# EAGLE board mainboard_10_1_Feb_2022,_200341 (EAGLE 9.6.2), part 1 of 2
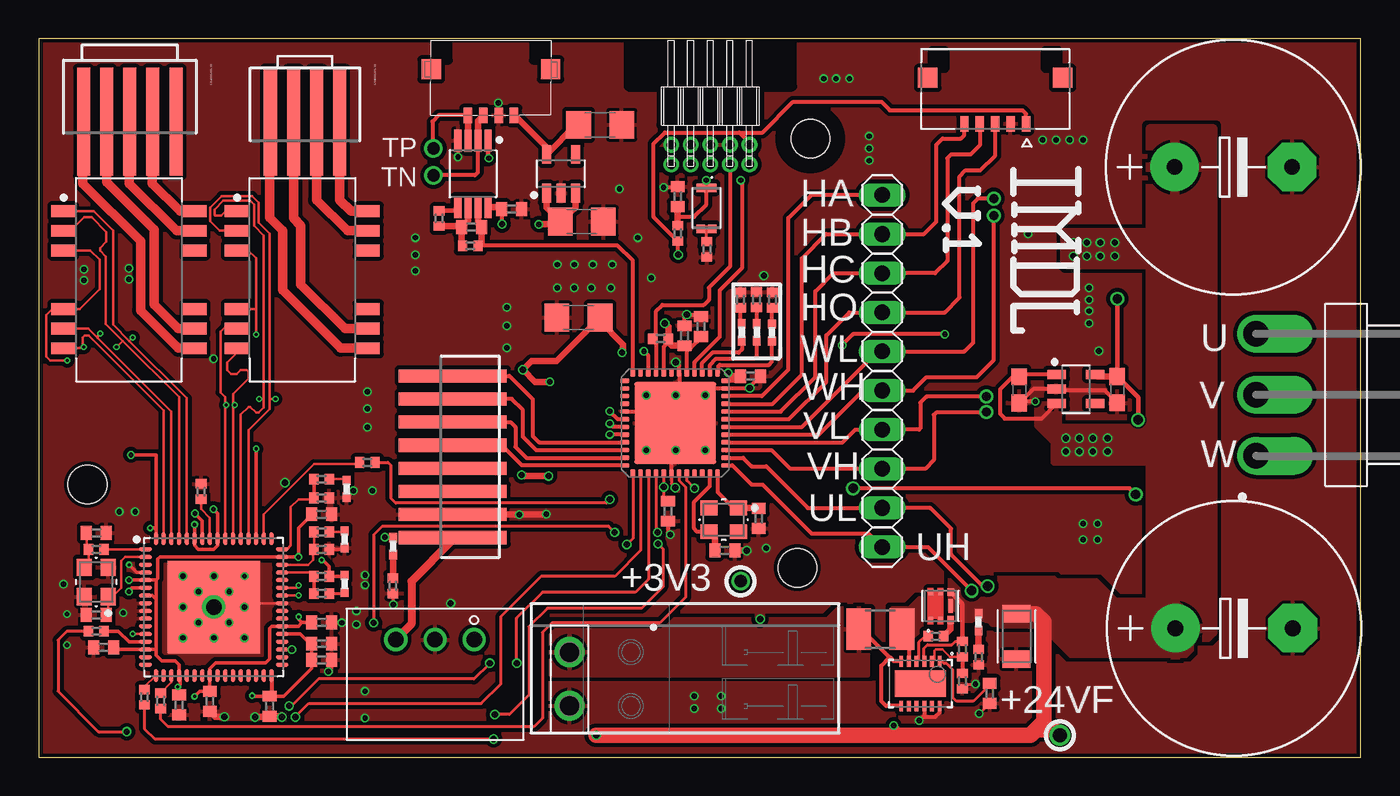
[diagram p0: board, top side]
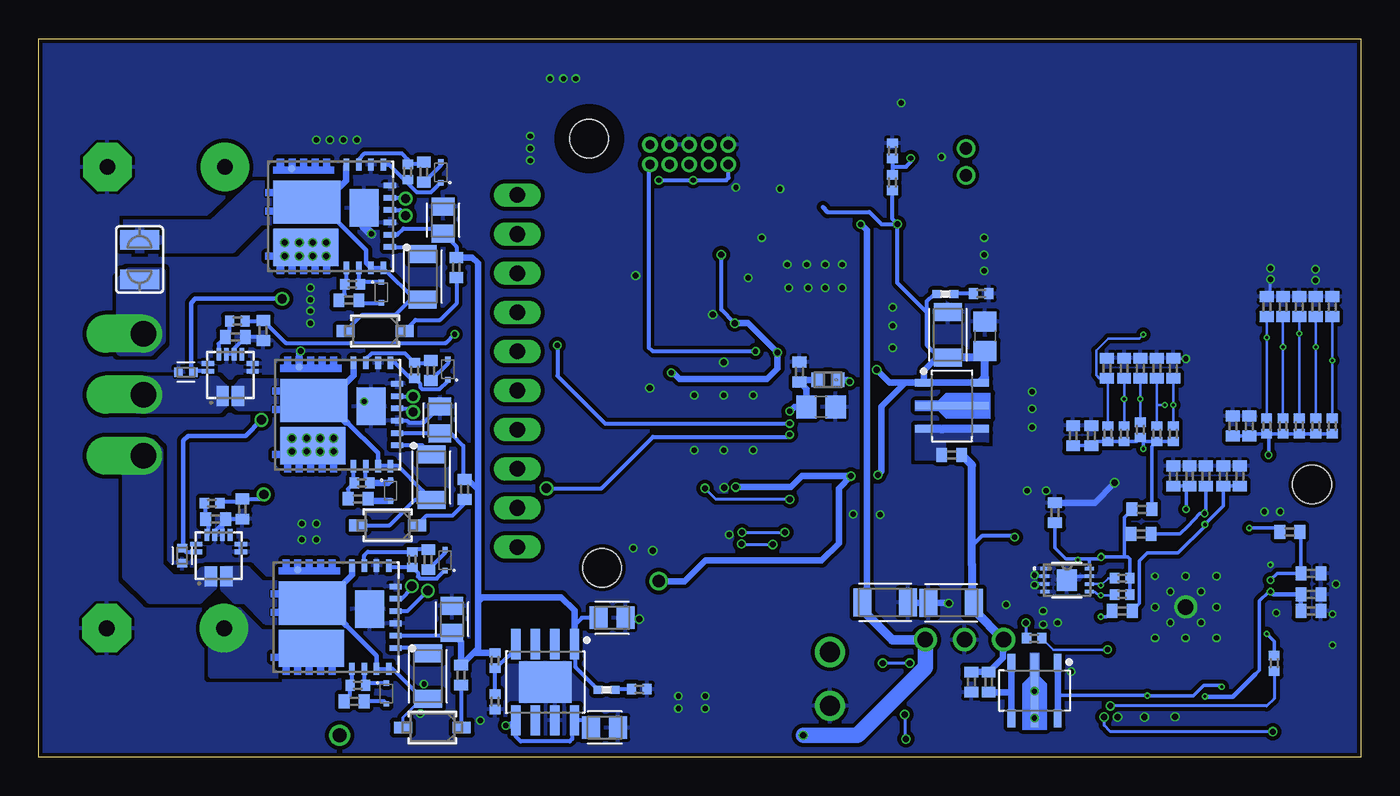
[diagram p1: board, bottom side, seen from below]

Size 85.82 x 46.66 mm. Coordinates in mm from the lower left corner, seen from the top.
Outline: 0,0 85.82,0 85.82,46.66 0,46.66 0,0
Copper layers (1*16): Top 0.018mm / dielectric 1.55mm / Bottom 0.018mm
Design rules "Multi-CB_2L_100µm-Tracks_OL35µm": minimum track width 0.1mm, minimum drill 0.2mm, track to track 0.1mm, track to pad 0.1mm, pad to pad 0.1mm, via to via 0.1mm, smd to smd 0mil, copper to edge 0.2mm, drill to drill 0.2mm, minimum pad ring 0.125mm, minimum via ring 0.1mm, stop-mask expansion 2mil, vias tented up to drill 0.45mm, thermal gap 0.2mm
Net classes: 0 default: width 0.152 mm, drill 0.2 mm, clearance 0.076 mm; 1 power: width 0.229 mm, drill 0.2 mm, clearance 0.152 mm
Holes 2.5 mm at 3.18,17.71 50.11,40.17 49.24,12.3
tKeepout: area 1.4,15.9 to 5,19.5; area 47.4,10.5 to 51,14.1
bKeepout: area 47.4,10.5 to 51,14.1; area 1.4,15.9 to 5,19.5
tRestrict: area 48.3,38.4 to 51.9,42
bRestrict: area 48.3,38.4 to 51.9,42

## Footprints (pad centres in the part's own frame; a part is rotated, then mirrored left to right if it is on the bottom)
C0402 = smd 0.7 x 0.9: 1 -0.65,0; 2 0.65,0
USOP8 = smd 1.425 x 0.467: 1 -2.164,0.975; 2 -2.164,0.325; 3 -2.164,-0.325; 4 -2.164,-0.975; 5 2.164,-0.975; 6 2.164,-0.325; 7 2.164,0.325; 8 2.164,0.975
R0402 = smd 0.6 x 0.7: 1 -0.5,0; 2 0.5,0
C1206 = smd 1.6 x 1.8: 1 -1.4,0; 2 1.4,0
C0805 = smd 1.3 x 1.5: 1 -0.95,0; 2 0.95,0
LED0402 = smd 0.6 x 0.5: 1 -0.55,0; 2 0.55,0
QFN48 = smd 0.55 x 0.3: 1 -3.275,2.75; 2 -3.275,2.25; 3 -3.275,1.75; 4 -3.275,1.25; 5 -3.275,0.75; 6 -3.275,0.25; 7 -3.275,-0.25; 8 -3.275,-0.75; 9 -3.275,-1.25; 10 -3.275,-1.75; 11 -3.275,-2.25; 12 -3.275,-2.75; 25 3.275,-2.75; 26 3.275,-2.25; 27 3.275,-1.75; 28 3.275,-1.25; 29 3.275,-0.75; 30 3.275,-0.25; 31 3.275,0.25; 32 3.275,0.75; 33 3.275,1.25; 34 3.275,1.75; 35 3.275,2.25; 36 3.275,2.75 | smd 0.3 x 0.55: 13 -2.75,-3.275; 14 -2.25,-3.275; 15 -1.75,-3.275; 16 -1.25,-3.275; 17 -0.75,-3.275; 18 -0.25,-3.275; 19 0.25,-3.275; 20 0.75,-3.275; 21 1.25,-3.275; 22 1.75,-3.275; 23 2.25,-3.275; 24 2.75,-3.275; 37 2.75,3.275; 38 2.25,3.275; 39 1.75,3.275; 40 1.25,3.275; 41 0.75,3.275; 42 0.25,3.275; 43 -0.25,3.275; 44 -0.75,3.275; 45 -1.25,3.275; 46 -1.75,3.275; 47 -2.25,3.275; 48 -2.75,3.275 | smd 5.309 x 5.309: EXP 0,0
BEADC1608X80 = smd 0.813 x 0.94: 1 -0.673,0; 2 0.673,0
USLPT2616CT = smd 0.55 x 0.55: 1 -1.325,0.375; 2 1.325,0.375; 3 -1.325,-0.375; 4 1.325,-0.375
ECX-2236 = smd 1.112 x 0.962: 1 -0.95,-0.775; 2 0.95,-0.775; 3 0.95,0.775; 4 -0.95,0.775
CAPC1005X60 = smd 0.56 x 0.629: 1 -0.485,0; 2 0.485,0
C0603 = smd 1.1 x 1: 1 -0.85,0; 2 0.85,0
QFN12-ES = smd 1.3 x 0.8: 1,2 -1.35,0.5; 3,4 -1.35,-0.5 | smd 0.3 x 0.8: 5 0.25,-1.45; 6 0.75,-1.45; 11 0.75,1.45; 12 0.25,1.45 | smd 0.8 x 0.3: 7 1.35,-0.75; 8 1.35,-0.25; 9 1.35,0.25; 10 1.35,0.75
SOT-23-5 = smd 1.209 x 0.589: 1 -1.253,0.95; 2 -1.253,0; 3 -1.253,-0.95; 4 1.253,-0.95; 5 1.253,0.95
SJW = smd 1.27 x 2.54: 1 -1.27,0; 2 1.27,0
UDFN8 = smd 0.606 x 0.225: 1 -1.446,0.75; 2 -1.446,0.25; 3 -1.446,-0.25; 4 -1.446,-0.75; 5 1.446,-0.75; 6 1.446,-0.25; 7 1.446,0.25; 8 1.446,0.75 | smd 1.295 x 1.397: 9 0,0
SOT-89-5 = smd 1.17 x 0.491: 1 -1.814,1.5; 3 -1.814,-1.5; 4 1.814,-1.5; 5 1.814,1.5 | smd 4.75 x 0.491: 2 0,0
BEAD0402 = smd 0.7 x 0.9: 1 -0.65,0; 2 0.65,0
SOIC127P965X533-16-TRAFO = smd 1.512 x 0.772: 1 -4.275,4.445; 2 -4.275,3.175; 3 -4.275,1.905; 6 -4.275,-1.905; 7 -4.275,-3.175; 8 -4.275,-4.445; 9 4.275,-4.445; 10 4.275,-3.175; 11 4.275,-1.905; 14 4.275,1.905; 15 4.275,3.175; 16 4.275,4.445
QFN64-T600 = smd 0.837 x 0.264: 1 -4.437,3.75; 2 -4.437,3.25; 3 -4.437,2.75; 4 -4.437,2.25; 5 -4.437,1.75; 6 -4.437,1.25; 7 -4.437,0.75; 8 -4.437,0.25; 9 -4.437,-0.25; 10 -4.437,-0.75; 11 -4.437,-1.25; 12 -4.437,-1.75; 13 -4.437,-2.25; 14 -4.437,-2.75; 15 -4.437,-3.25; 16 -4.437,-3.75; 33 4.437,-3.75; 34 4.437,-3.25; 35 4.437,-2.75; 36 4.437,-2.25; 37 4.437,-1.75; 38 4.437,-1.25; 39 4.437,-0.75; 40 4.437,-0.25; 41 4.437,0.25; 42 4.437,0.75; 43 4.437,1.25; 44 4.437,1.75; 45 4.437,2.25; 46 4.437,2.75; 47 4.437,3.25; 48 4.437,3.75 | smd 0.264 x 0.837: 17 -3.75,-4.437; 18 -3.25,-4.437; 19 -2.75,-4.437; 20 -2.25,-4.437; 21 -1.75,-4.437; 22 -1.25,-4.437; 23 -0.75,-4.437; 24 -0.25,-4.437; 25 0.25,-4.437; 26 0.75,-4.437; 27 1.25,-4.437; 28 1.75,-4.437; 29 2.25,-4.437; 30 2.75,-4.437; 31 3.25,-4.437; 32 3.75,-4.437; 49 3.75,4.437; 50 3.25,4.437; 51 2.75,4.437; 52 2.25,4.437; 53 1.75,4.437; 54 1.25,4.437; 55 0.75,4.437; 56 0.25,4.437; 57 -0.25,4.437; 58 -0.75,4.437; 59 -1.25,4.437; 60 -1.75,4.437; 61 -2.25,4.437; 62 -2.75,4.437; 63 -3.25,4.437; 64 -3.75,4.437 | smd 6 x 6: 65 0,0
87438-04 = smd 7 x 0.85: 1 0,2.25; 2 0,0.75; 3 0,-0.75; 4 0,-2.25
87438-05 = smd 7 x 0.85: 1 0,3; 2 0,1.5; 3 0,0; 4 0,-1.5; 5 0,-3
20021112-00010 = drill 0.6 pad 1.016: 1 -2.54,-0.635; 2 -2.54,0.635; 3 -1.27,-0.635; 4 -1.27,0.635; 5 0,-0.635; 6 0,0.635; 7 1.27,-0.635; 8 1.27,0.635; 9 2.54,-0.635; 10 2.54,0.635
CAPC2012X110 = smd 1.165 x 1.465: 1 -0.875,0; 2 0.875,0
CAPC3216X135 = smd 1.165 x 1.815: 1 -1.475,0; 2 1.475,0
E7,5-16 = drill 1.016 pad 3.15: + -3.81,0 | drill 1.016 pad 3.15 octagon: - 3.81,0
SOD123_MCC-M = smd 1.168 x 0.762: 1 -1.905,0; 2 1.905,0
INFINEON_BAS3005A-02V_0 = smd 0.35 x 0.35: 1 -0.672,0; 2 0.678,0
R0402' = smd 0.7 x 0.9: 1 -0.65,0; 2 0.65,0
INFINEON_IRSM005-800MH_0 = smd 0.36 x 0.8: 1 -2,-3.85; 2 -1.2,-3.85; 3 -0.4,-3.85; 4 0.4,-3.85; 5 1.2,-3.85; 6 2,-3.85 | smd 0.8 x 0.36: 7 3.35,-3.42; 8 3.35,-2.62; 9 3.35,-1.82; 10 3.35,-1.02; 24 -3.35,-1.02; 25 -3.35,-1.82; 26 -3.35,-2.62; 27 -3.35,-3.42 | smd 0.489 x 0.489: 11-12-13-14-15 3.076,2.516 | smd 2.794 x 4.318: 16-17 0.915,1.546 | smd 2.413 x 4.191: 18-19-20-21-22-23 -2.016,1.602 | smd 2.43 x 1.86: 28 0.53,-2.17
MOLEX_5037630591 = smd 0.55 x 1: 1 2,-2.265; 2 1,-2.265; 3 0,-2.265; 4 -1,-2.265; 5 -2,-2.265 | smd 1.26 x 1.3: S1 4.375,0.725; S2 -4.375,0.725
1X10 = drill 1.016 long: 1 -11.43,0; 2 -8.89,0; 3 -6.35,0; 4 -3.81,0; 5 -1.27,0; 6 1.27,0; 7 3.81,0; 8 6.35,0; 9 8.89,0; 10 11.43,0
1945096 = drill 1.3: 1 -1.75,0; 2 1.75,0
SOIC127P600X170-9T271X340N = smd 1.968 x 0.598: 1 -2.473,1.905; 2 -2.473,0.635; 3 -2.473,-0.635; 4 -2.473,-1.905; 5 2.473,-1.905; 6 2.473,-0.635; 7 2.473,0.635; 8 2.473,1.905 | smd 2.71 x 3.402: 9 0,0
R78E-1.0 = drill 1 pad 1.422: 1 -2.54,-2.54; 2 0,-2.54; 3 2.54,-2.54
TRANS_DMN4020LFDE-7 = smd 0.4 x 0.3: 1 -0.9,0.65; 2 -0.9,0; 5 0.9,0; 6 0.9,0.65 | smd 0.5 x 0.4: 3 -0.9,-0.65; 4_1 0.9,-0.65 | smd 0.92 x 0.285: 4_2 0,-0.65
R1210 = smd 1.6 x 2.7: 1 -1.4,0; 2 1.4,0
LINEAR_TECHNOLOGY_LT4356IDE-1#PBF_0 = smd 0.7 x 0.25: 1 -1.45,1.25; 2 -1.45,0.75; 3 -1.45,0.25; 4 -1.45,-0.25; 5 -1.45,-0.75; 6 -1.45,-1.25; 7 1.45,-1.25; 8 1.45,-0.75; 9 1.45,-0.25; 10 1.45,0.25; 11 1.45,0.75; 12 1.45,1.25 | smd 1.7 x 3.3: 13 0,0
B3PS-VH(LF)(SN) = drill 1.65 offset: 1 -3.96,0; 2 0,0; 3 3.96,0
87438-08 = smd 7 x 0.85: 1 0,5.25; 2 0,3.75; 3 0,2.25; 4 0,0.75; 5 0,-0.75; 6 0,-2.25; 7 0,-3.75; 8 0,-5.25
5037630491 = smd 0.55 x 1: 1 1.5,0; 2 0.5,0; 3 -0.5,0; 4 -1.5,0 | smd 1.26 x 1.3: P$1 3.875,2.99; P$2 -3.875,2.99

## Placement (x,y rotation side)
AFE_TRQ1:C1  GCM155R71C683KA55  [C0402]  28.1,34.43 180 top
AFE_TRQ1:C2  GCM155R71C104JA55  [C0402]  30.7,35.57 0 top
AFE_TRQ1:IC1  MAX4208AUA+T  [USOP8]  28.19,37.88 270 top
AFE_TRQ1:R1  RT0402FRE07100RL  [R0402]  25.99,34.98 270 top
AFE_TRQ1:R2  RT0402BRD0712KL  [R0402]  30.4,37.31 270 bottom
AFE_TRQ1:R3  RT0402FRE0756KL  [R0402]  28.02,33.2 0 top
AFE_TRQ1:R4  RT0402BRD0710KL  [R0402]  30.4,39.37 270 bottom
ATSAMD:C4  GCM31CR71C106KA64  [C1206]  35.04,28.55 180 top
ATSAMD:C5  GCM21BR70J106KE22K  [C0805]  35.04,22.75 0 bottom
ATSAMD:C6  GCM21BR70J106KE22K  [C0805]  24.4,27.33 90 bottom
ATSAMD:C7  GCM155R71C104JA55  [C0402]  41.92,27.37 90 top
ATSAMD:C8  GCM155R71C104JA55  [C0402]  36.44,25.02 90 bottom
ATSAMD:C9  GCM155R71C104JA55  [C0402]  40.84,15.98 270 top
ATSAMD:C10  GCM155R71C104JA55  [C0402]  46.2,24.74 0 top
ATSAMD:C11  GCM155R71C104JA55  [C0402]  42.99,27.97 90 top
ATSAMD:C12  GCM155R71C104JA55  [C0402]  41.48,36.4 90 top
ATSAMD:C22  GCM1555C1H150FA16  [C0402]  44.54,13.44 180 top
ATSAMD:C23  GCM1555C1H150FA16  [C0402]  46.74,15.5 90 top
ATSAMD:D1  QBLP595-IB  [LED0402]  45.64,27.59 270 top
ATSAMD:D2  QBLP595-O  [LED0402]  47.6,27.58 270 top
ATSAMD:D3  QBLP595-Y  [LED0402]  46.61,27.59 270 top
ATSAMD:IC2  ATSAMD51G18A-MUT  [QFN48]  41.32,21.7 0 top
ATSAMD:L1  BLM18EG221SN1D  [BEADC1608X80]  34.59,24.51 180 bottom
ATSAMD:R1  RT0402BRD0710KL  [R0402]  47.62,29.69 90 top
ATSAMD:R2  RT0402BRD0710KL  [R0402]  45.56,29.69 90 top
ATSAMD:R4  RT0402BRD0710KL  [R0402]  46.59,29.71 90 top
ATSAMD:R5  RT0402FRE07300RL  [R0402]  43.37,32.98 90 top
ATSAMD:R6  RT0402FRE0710KL  [R0402]  41.48,34.02 270 top
ATSAMD:R7  RT0402FRE071KL  [R0402]  40.37,27.17 0 top
ATSAMD:S2  USLPT2616CT2TR  [USLPT2616CT]  43.35,35.64 270 top
ATSAMD:Y2  [ECX-2236]  44.46,15.42 180 top
CURRENT_SENS:C1  0.1u  [CAPC1005X60]  76.5,13.09 90 bottom
CURRENT_SENS:C2  0.1u  [CAPC1005X60]  76.25,25 0 bottom
CURRENT_SENS:C3  GCM1555C1H510JA01  [C0402]  73.04,27.28 0 bottom
CURRENT_SENS:C4  GCM1555C1H510JA01  [C0402]  74.33,15.46 0 bottom
CURRENT_SENS:C5  GCM155R71E223KA55  [C0402]  72.59,16.12 270 bottom
CURRENT_SENS:C6  GCM155R71E223KA55  [C0402]  71.23,27.71 270 bottom
CURRENT_SENS:C7  GCM188R71C105KA64  [C0603]  70,23.87 270 top
CURRENT_SENS:C8  GCM188R71C105KA64  [C0603]  63.65,23.85 270 top
CURRENT_SENS:IC1  ACS70331EESATR-005B3  [QFN12-ES]  74.14,13.08 90 bottom
CURRENT_SENS:IC2  ACS70331EESATR-005B3  [QFN12-ES]  73.37,24.82 90 bottom
CURRENT_SENS:IC4  AP2204K-3.3TRG1  [SOT-23-5]  67.32,23.91 0 top
CURRENT_SENS:R3  RT0402BRD071KL  [R0402]  74.56,16.5 180 bottom
CURRENT_SENS:R4  RT0402BRD071KL  [R0402]  72.92,28.32 180 bottom
CURRENT_SENS:SJ1  [SJW]  79.26,32.31 270 bottom
ETHERCAT1:C1  1u  [C0402]  18.68,20.88 90 bottom
ETHERCAT1:C2  100n  [C0402]  17.5,20.88 90 bottom
ETHERCAT1:C3  1u  [C0402]  8.31,21.5 90 bottom
ETHERCAT1:C4  100n  [C0402]  7.25,21.5 90 bottom
ETHERCAT1:C5  100n  [C0402]  10.06,18.25 90 bottom
ETHERCAT1:C6  1u  [C0402]  12.18,18.25 90 bottom
ETHERCAT1:C7  100n  [C0402]  11.12,18.25 90 bottom
ETHERCAT1:C8  1u  [C0402]  8.93,18.25 90 bottom
ETHERCAT1:C9  100n  [C0402]  7.87,18.25 90 bottom
ETHERCAT1:C10  100n  [C0402]  3.25,11.94 0 bottom
ETHERCAT1:C11  100n  [C0402]  4.22,7.13 180 top
ETHERCAT1:C12  100n  [C0402]  9.12,3.4 270 top
ETHERCAT1:C13  100n  [C0402]  15,3.32 270 top
ETHERCAT1:C14  100n  [C0402]  18.37,7.38 0 top
ETHERCAT1:C15  100n  [C0402]  18.37,15.78 0 top
ETHERCAT1:C16  1u  [C0402]  3.25,10.57 0 bottom
ETHERCAT1:C17  470p  [C0402]  3.25,9.5 0 bottom
ETHERCAT1:C18  100n  [C0402]  11.12,3.64 270 top
ETHERCAT1:C19  100n  [C0402]  18.37,8.75 0 top
ETHERCAT1:C20  18p  [C0402]  3.75,14.57 180 top
ETHERCAT1:C21  18p  [C0402]  3.75,9.25 0 top
ETHERCAT1:C22  100n  [C0402]  19.86,15.88 90 bottom
ETHERCAT1:C23  GCM1555C1H100JA16  [C0402]  12.18,25.25 90 bottom
ETHERCAT1:C24  GCM1555C1H100JA16  [C0402]  13.25,25.25 90 bottom
ETHERCAT1:C25  GCM1555C1H100JA16  [C0402]  14.31,25.25 90 bottom
ETHERCAT1:C26  GCM1555C1H100JA16  [C0402]  15.37,25.25 90 bottom
ETHERCAT1:C27  GCM1555C1H100JA16  [C0402]  6.12,29.25 90 bottom
ETHERCAT1:C28  GCM1555C1H100JA16  [C0402]  5.06,29.25 90 bottom
ETHERCAT1:C29  GCM1555C1H100JA16  [C0402]  4,29.25 90 bottom
ETHERCAT1:C30  GCM1555C1H100JA16  [C0402]  2.93,29.25 90 bottom
ETHERCAT1:C31  22n  [C0402]  16.5,25.25 90 bottom
ETHERCAT1:C32  22n  [C0402]  1.87,29.25 90 bottom
ETHERCAT1:C33  GRM155C80J106ME11D  [C0402]  18.37,6.32 0 top
ETHERCAT1:C66  1uF  [C0402]  25.29,4.89 270 bottom
ETHERCAT1:D1  QBLP595-IG  [LED0402]  19.87,11.25 90 top
ETHERCAT1:D2  QBLP595-IG  [LED0402]  20,17.43 90 top
ETHERCAT1:D3  QBLP595-IG  [LED0402]  19.87,14.15 90 top
ETHERCAT1:IC1  CAT24C512HU5IGT3  [UDFN8]  19.07,11.5 0 bottom
ETHERCAT1:IC2  RP115H331B-T1-FE  [SOT-89-5]  21.19,4.33 270 bottom
ETHERCAT1:L1  BLM15EG221SH1D  [BEAD0402]  14.22,16.1 0 bottom
ETHERCAT1:L2  BLM15EG221SH1D  [BEAD0402]  4.62,14.63 180 bottom
ETHERCAT1:L3  BLM15EG221SH1D  [BEAD0402]  14.27,14.49 0 bottom
ETHERCAT1:L4  BLM15EG221SH1D  [BEAD0402]  15.5,9.5 0 bottom
ETHERCAT1:L5  BLM15EG221SH1D  [BEAD0402]  24.16,4.89 270 bottom
ETHERCAT1:R1  0R  [R0402]  3.75,13.5 0 top
ETHERCAT1:R2  12k1  [R0402]  10.55,17.25 270 top
ETHERCAT1:R4  4k7  [R0402]  15.5,11.63 0 bottom
ETHERCAT1:R5  4k7  [R0402]  15.5,10.57 0 bottom
ETHERCAT1:R6  10k  [R0402]  18.37,11.75 0 top
ETHERCAT1:R7  RL1206FR-7WL  [R0402]  18.37,10.63 180 top
ETHERCAT1:R8  49R9  [R0402]  15.37,21 270 bottom
ETHERCAT1:R9  49R9  [R0402]  14.31,21.25 270 bottom
ETHERCAT1:R10  49R9  [R0402]  13.25,21 270 bottom
ETHERCAT1:R11  49R9  [R0402]  12.18,21 270 bottom
ETHERCAT1:R12  49R9  [R0402]  2.93,21.5 270 bottom
ETHERCAT1:R13  49R9  [R0402]  4,21.5 270 bottom
ETHERCAT1:R14  49R9  [R0402]  5.06,21.5 270 bottom
ETHERCAT1:R15  49R9  [R0402]  6.12,21.5 270 bottom
ETHERCAT1:R16  0R  [R0402]  16.43,21 270 bottom
ETHERCAT1:R17  0R  [R0402]  1.87,21.5 270 bottom
ETHERCAT1:R18  100  [R0402]  7.93,3.67 270 top
ETHERCAT1:R19  100  [R0402]  21.34,19.14 0 top
ETHERCAT1:R20  100  [R0402]  21.2,7.73 180 bottom
ETHERCAT1:R21  100  [R0402]  5.64,6.1 270 bottom
ETHERCAT1:R22  100  [R0402]  3.75,8.19 180 top
ETHERCAT1:R23  100  [R0402]  6.87,3.9 270 top
ETHERCAT1:R24  10k  [R0402]  18.37,16.84 180 top
ETHERCAT1:R25  10k  [R0402]  18.37,13.5 180 top
ETHERCAT1:R26  RL1206FR-7WL  [R0402]  18.37,18.05 0 top
ETHERCAT1:R27  RL1206FR-7WL  [R0402]  18.37,14.63 0 top
ETHERCAT1:T1  749020100  [SOIC127P965X533-16-TRAFO]  17.12,31 0 top
ETHERCAT1:T2  749020100  [SOIC127P965X533-16-TRAFO]  5.87,31 0 top
ETHERCAT1:U1  LAN9252/ML  [QFN64-T600]  11.37,9.75 0 top
ETHERCAT1:X1  87438-0443  [87438-04]  17.3,41.25 270 top
ETHERCAT1:X3  87438-0543  [87438-05]  5.92,41.25 270 top
ETHERCAT1:Y1  [ECX-2236]  3.75,11.38 90 top
H1  20021112-00010T4LF  [20021112-00010]  43.6,39.13 180 top
INVERTER:C1  10u 25V  [CAPC2012X110]  58.99,8.96 270 bottom
INVERTER:C2  10u 50V  [CAPC3216X135]  60.55,5.27 270 bottom
INVERTER:C3  10u 25V  [CAPC2012X110]  59.77,21.89 270 bottom
INVERTER:C4  10u 50V  [CAPC3216X135]  60.33,18.18 270 bottom
INVERTER:C5  10u 25V  [CAPC2012X110]  59.57,34.87 270 bottom
INVERTER:C6  10u 50V  [CAPC3216X135]  60.88,31.19 270 bottom
INVERTER:C7  1mF  [E7,5-16]  77.54,38.32 0 top
INVERTER:C8  1mF  [E7,5-16]  77.59,8.38 0 top
INVERTER:CR1  1N4148W-TPSOD123_MCC-M  [SOD123_MCC-M]  63.17,15.06 180 bottom
INVERTER:CR2  1N4148W-TPSOD123_MCC-M  [SOD123_MCC-M]  63.98,27.67 180 bottom
INVERTER:CR3  1N4148W-TPSOD123_MCC-M  [SOD123_MCC-M]  60.26,1.94 180 bottom
INVERTER:D2  BAS3005A-02V_0  [INFINEON_BAS3005A-02V_0]  63.24,4.15 270 bottom
INVERTER:D3  BAS3005A-02V_0  [INFINEON_BAS3005A-02V_0]  59.44,12.8 90 bottom
INVERTER:D4  BAS3005A-02V_0  [INFINEON_BAS3005A-02V_0]  59.26,25.17 90 bottom
INVERTER:D5  BAS3005A-02V_0  [INFINEON_BAS3005A-02V_0]  62.98,17.31 270 bottom
INVERTER:D7  BAS3005A-02V_0  [INFINEON_BAS3005A-02V_0]  59.7,37.97 90 bottom
INVERTER:D8  BAS3005A-02V_0  [INFINEON_BAS3005A-02V_0]  63.57,30.18 270 bottom
INVERTER:R1  100  [R0402]  61.56,12.83 90 bottom
INVERTER:R2  27  [R0402']  60.53,12.83 90 bottom
INVERTER:R3  100  [R0402]  65.1,4.67 180 bottom
INVERTER:R4  27  [R0402']  60.36,25.11 90 bottom
INVERTER:R5  5.1  [R0402']  58.71,31.8 90 bottom
INVERTER:R6  27  [R0402']  65.08,16.79 180 bottom
INVERTER:R7  100  [R0402]  61.42,25.1 90 bottom
INVERTER:R8  100  [R0402]  64.82,17.82 180 bottom
INVERTER:R9  27  [R0402']  60.81,37.99 90 bottom
INVERTER:R10  5.1  [R0402']  58.17,17.39 90 bottom
INVERTER:R11  100  [R0402]  61.86,37.99 90 bottom
INVERTER:R12  100  [R0402]  65.44,30.7 180 bottom
INVERTER:R13  27  [R0402']  65.69,29.67 180 bottom
INVERTER:R14  5.1  [R0402']  58.4,5.34 90 bottom
INVERTER:R15  27  [R0402']  65.34,3.64 180 bottom
INVERTER:U$1  IRMS005-800MHTR  [INFINEON_IRSM005-800MH_0]  66.5,9.09 90 bottom
INVERTER:U$2  IRMS005-800MHTR  [INFINEON_IRSM005-800MH_0]  66.4,22.25 90 bottom
INVERTER:U$3  IRMS005-800MHTR  [INFINEON_IRSM005-800MH_0]  66.86,35.12 90 bottom
J1  5037630591  [MOLEX_5037630591]  62.09,43.38 0 top
JP1  [1X10]  54.75,25.08 90 top
M1  PST1,3/2-3,5  [1945096]  34.45,5.08 270 top
POWER_UNIT:C1  GCM155R71E223KA55  [C0402]  61.72,4.15 270 top
POWER_UNIT:C2  10u 50V  [CAPC3216X135]  26.81,27.43 90 bottom
POWER_UNIT:C3  10u 50V  [CAPC3216X135]  30.88,10.05 0 bottom
POWER_UNIT:C4  10u 50V  [CAPC3216X135]  26.6,10.03 180 bottom
POWER_UNIT:C5  GCM31CR71H225KA55  [C1206]  35.26,34.78 0 top
POWER_UNIT:C6  10u 50V  [CAPC3216X135]  63.47,7.85 270 top
POWER_UNIT:C7  2.2u  [CAPC2012X110]  49.08,1.93 0 bottom
POWER_UNIT:C8  2.2u  [CAPC2012X110]  48.6,9.06 0 bottom
POWER_UNIT:C9  GCM31CR71H225KA55  [C1206]  36.45,41.05 0 top
POWER_UNIT:D1  QBLP595-IG  [LED0402]  61,8.78 90 top
POWER_UNIT:D2  QBLP595-IG  [LED0402]  23.01,13.7 90 top
POWER_UNIT:D3  QBLP595-IG  [LED0402]  26.97,30.08 180 bottom
POWER_UNIT:D4  QBLP595-IG  [LED0402]  48.96,4.39 180 bottom
POWER_UNIT:IC1  RP115H331B-T1-FE  [SOT-89-5]  26.54,22.82 0 bottom
POWER_UNIT:IC2  AP2204MP-ADJTRG1  [SOIC127P600X170-9T271X340N]  52.95,4.88 270 bottom
POWER_UNIT:IC3  AP2204K-3.3TRG1  [SOT-23-5]  33.91,37.88 90 top
POWER_UNIT:L5  BLM15EG221SH1D  [BEAD0402]  26.56,19.63 180 bottom
POWER_UNIT:PS2  R78E-1.0-5V  [R78E-1.0]  25.73,5.1 180 top
POWER_UNIT:Q1  DMN4020LFDE-7  [TRANS_DMN4020LFDE-7]  58.54,9.83 90 top
POWER_UNIT:R1  RT0402FRE07100RL  [R0402]  58.23,7.87 0 top
POWER_UNIT:R2  RT0402FRE07100KL  [R0402]  59.96,7.02 90 top
POWER_UNIT:R4  10m  [R1210]  54.63,8.32 180 top
POWER_UNIT:R5  11k  [R0402]  56.19,6.29 90 bottom
POWER_UNIT:R6  1k  [R0402]  56.19,3.61 90 bottom
POWER_UNIT:R7  1k  [R0402]  61.01,6.51 90 top
POWER_UNIT:R8  1k  [R0402]  22.99,11.13 90 top
POWER_UNIT:R9  1k  [R0402]  24.64,30.1 180 bottom
POWER_UNIT:R10  1k  [R0402]  46.84,4.43 180 bottom
POWER_UNIT:R11  RT0402BRD074K99L  [R0402]  59.95,4.95 90 top
POWER_UNIT:U1  LT4356-1LINEAR_TECHNOLOGY_LT4356IDE-1#PBF_0_0  [LINEAR_TECHNOLOGY_LT4356IDE-1#PBF_0]  57.23,4.78 270 top
U$1  PTDA1,5/2-PH-3,5  [1725107]  34.45,5.08 90 top
X2  B3PS-VH(LF)(SN)  [B3PS-VH(LF)(SN)]  79.01,23.54 90 top
X4  87438-0843  [87438-08]  26.88,19.51 180 top
X5  5037630491  [5037630491]  29.36,41.67 0 top

## Library data of the parts
AFE_TRQ1:C1 = msrm; CAPACITANCE: 6n8F; DIGIKEY: 490-12655-1-ND; TOLERANCE: ±10%; VOLTAGE: 16V
AFE_TRQ1:C2 ATSAMD:C7-ATSAMD:C12 ETHERCAT1:C2 ETHERCAT1:C4 ETHERCAT1:C5 ETHERCAT1:C7 ETHERCAT1:C9-ETHERCAT1:C15 ETHERCAT1:C18 ETHERCAT1:C19 ETHERCAT1:C22 = msrm; CAPACITANCE: 100nF; DIGIKEY: 490-16433-1-ND; TOLERANCE: ±5%; VOLTAGE: 16V
AFE_TRQ1:IC1 = msrm; DESCRIPTION: Instrument Amp Single R-R O/P 2.75/5.5V; DIGIKEY: MAX4208AUA+-ND; HEIGHT: 1.1mm; INPUT_RESISTANCE: 2G; MANUFACTURER_NAME: Maxim Integrated; MANUFACTURER_PART_NUMBER: MAX4208AUA+; MOUSER_PART_NUMBER: 700-MAX4208AUA; MOUSER_PRICE-STOCK: https://www.mouser.com/Search/Refine.aspx?Keyword=700-MAX4208AUA; RS_PART_NUMBER: 7328406P; RS_PRICE-STOCK: http://uk.rs-online.com/web/p/products/7328406P; SUPPLY_CURRENT: Buffer OFF: 0.75 - 1.3 mA Buffer ON: 1.4 - 2.3 mA; SUPPLY_VOLTAGE: Single: 2.85 - 5.5 Dual: ±1.425 - ±2.75; VOLTAGE_GAIN: 1 - (1 + R2/R1)
AFE_TRQ1:R1 ETHERCAT1:R18-ETHERCAT1:R23 INVERTER:R1 INVERTER:R3 INVERTER:R7 INVERTER:R8 INVERTER:R11 INVERTER:R12 POWER_UNIT:R1 = msrm; DIGIKEY: YAG3342CT-ND; RVALUE: 100; SPICEPREFIX: R
AFE_TRQ1:R2 POWER_UNIT:R5 = msrm; DIGIKEY: YAG1354CT-ND; RVALUE: 12k; SPICEPREFIX: R
AFE_TRQ1:R3 = msrm; DIGIKEY: RT0402FRE0756K2L-ND; RVALUE: 56k; SPICEPREFIX: R
AFE_TRQ1:R4 ATSAMD:R1 ATSAMD:R2 ATSAMD:R4 = msrm; DIGIKEY: ‎A119918CT-ND‎; RVALUE: 10k; SPICEPREFIX: R
ATSAMD:C4 = msrm; CAPACITANCE: 10uF; DIGIKEY: 490-14746-1-ND; TOLERANCE: ±10%; VOLTAGE: 16V
ATSAMD:C5 ATSAMD:C6 = msrm; CAPACITANCE: 10uF; DIGIKEY: 490-14361-1-ND; TOLERANCE: ±10%; VOLTAGE: 6.3V
ATSAMD:C22 ATSAMD:C23 = msrm; CAPACITANCE: 15pF; DIGIKEY: 490-14350-1-ND; TOLERANCE: ±1%; VOLTAGE: 50V
ATSAMD:D1 = msrm; COLOR: Blue; DIGIKEY: 1516-1215-1-ND
ATSAMD:D2 = msrm; COLOR: Orange; DIGIKEY: 1516-1220-1-ND
ATSAMD:D3 = msrm; COLOR: Yellow; DIGIKEY: 1516-1219-1-ND
ATSAMD:IC2 = msrm; DIGIKEY: ATSAMD51G18A-MUTCT-ND; FLASH: 256KB; SRAM: 128KB
ATSAMD:L1 = msrm; DC_RES: 50mOhm; DIGIKEY: 490-3992-6-ND; IMPEDANCE-FREQUENCY: 220 Ohms @ 100MHz
ATSAMD:R5 = msrm; DIGIKEY: RT0402FRE07300RL-ND; RVALUE: 300; SPICEPREFIX: R
ATSAMD:R6 ETHERCAT1:R6 ETHERCAT1:R7 ETHERCAT1:R24-ETHERCAT1:R27 = msrm; DIGIKEY: YAG1233CT-ND; RVALUE: 10k; SPICEPREFIX: R
ATSAMD:R7 = msrm; DIGIKEY: YAG1234CT-ND; RVALUE: 1k; SPICEPREFIX: R
ATSAMD:S2 = msrm; DIGIKEY: 450-3357-1-ND; FORCE: 160gf; HEIGHT: 0.55mm; MANUFACTURER_NAME: TE Connectivity; MANUFACTURER_PART_NUMBER: USLPT2616CT2TR; MOUSER_PART_NUMBER: 506-USLPT2616CT2TR
ATSAMD:Y2 = msrm; DIGIKEY: XC3057CT-ND; ESR: 40 Ohm; F: 32MHz; F_TOLERANCE: ±10ppm; L_CAPACITANCE: 12pF
CURRENT_SENS:C1 CURRENT_SENS:C2 INVERTER:C1-INVERTER:C6 POWER_UNIT:C6-POWER_UNIT:C8 = Capacitor; CATEGORY: Capacitor
CURRENT_SENS:C3 CURRENT_SENS:C4 = msrm; CAPACITANCE: 51pF; DIGIKEY: 490-5944-1-ND; TOLERANCE: ±5%; VOLTAGE: 50V
CURRENT_SENS:C5 CURRENT_SENS:C6 ETHERCAT1:C31 ETHERCAT1:C32 POWER_UNIT:C1 = msrm; CAPACITANCE: 22nF; DIGIKEY: 490-6044-1-ND; TOLERANCE: ±10%; VOLTAGE: 25V
CURRENT_SENS:C7 CURRENT_SENS:C8 = msrm; CAPACITANCE: 1uF; DIGIKEY: 490-5241-1-ND; TOLERANCE: ±10%; VOLTAGE: 16V
CURRENT_SENS:IC1 CURRENT_SENS:IC2 = msrm; CURRENT_RANGE: -5~5A; DIGIKEY: 620-1887-1-ND; DISPLAY: ACS70331; SENSITIVITY: 200mV/A
CURRENT_SENS:IC4 POWER_UNIT:IC3 = msrm; DIGIKEY: AP2204K-3.3TRG1DICT-ND
CURRENT_SENS:R3 CURRENT_SENS:R4 POWER_UNIT:R6-POWER_UNIT:R10 = msrm; DIGIKEY: YAG1386CT-ND; RVALUE: 1k; SPICEPREFIX: R
CURRENT_SENS:SJ1 = jumper
ETHERCAT1:C1 ETHERCAT1:C3 ETHERCAT1:C6 ETHERCAT1:C8 ETHERCAT1:C16 ETHERCAT1:C66 = msrm; CAPACITANCE: 1uF; DIGIKEY: 490-13409-1-ND; TOLERANCE: ±10%; VOLTAGE: 10V
ETHERCAT1:C17 = msrm; CAPACITANCE: 470pF; DIGIKEY: 490-4913-1-ND; TOLERANCE: ±10%; VOLTAGE: 50V
ETHERCAT1:C20 ETHERCAT1:C21 = msrm; CAPACITANCE: 18pF; DIGIKEY: 490-12650-1-ND; TOLERANCE: ±5%; VOLTAGE: 50V
ETHERCAT1:C23-ETHERCAT1:C30 = msrm; CAPACITANCE: 10pF; DIGIKEY: 490-10668-1-ND; TOLERANCE: ±5%; VOLTAGE: 50V
ETHERCAT1:C33 = msrm; CAPACITANCE: 10uF; DIGIKEY: 490-13233-1-ND; TOLERANCE: ±20%; VOLTAGE: 6.3V
ETHERCAT1:D1-ETHERCAT1:D3 POWER_UNIT:D1-POWER_UNIT:D4 = msrm; COLOR: Green; DIGIKEY: 1516-1216-1-ND
ETHERCAT1:IC1 = msrm; DIGIKEY: CAT24C512HU5IGT3OSCT-ND; LEAD_FINISH: NiPdAu; TEMPERATURE: -40°C ~ 85°C
ETHERCAT1:IC2 POWER_UNIT:IC1 = msrm; DIGIKEY: RP115H331B-T1-FE-ND; VOLTAGE: 3.3V
ETHERCAT1:L1-ETHERCAT1:L5 POWER_UNIT:L5 = msrm; DC_RES: 280mOhm; DIGIKEY: 490-17345-1-ND; IMPEDANCE-FREQUENCY: 220 Ohms @ 100MHz
ETHERCAT1:R1 ETHERCAT1:R16 ETHERCAT1:R17 = msrm; DIGIKEY: 311-0.0LRCT-ND; NOTES: Actual Part Number: RC0402FR-070RL; RVALUE: 0R; SPICEPREFIX: R
ETHERCAT1:R2 = msrm; DIGIKEY: RT0402FRE0712K1L-ND; RVALUE: 12k1; SPICEPREFIX: R
ETHERCAT1:R4 ETHERCAT1:R5 = msrm; DIGIKEY: YAG3347CT-ND; RVALUE: 4k7; SPICEPREFIX: R
ETHERCAT1:R8-ETHERCAT1:R15 = msrm; DIGIKEY: YAG3346CT-ND; RVALUE: 49R9; SPICEPREFIX: R
ETHERCAT1:T1 ETHERCAT1:T2 = msrm; DIGIKEY: 732-3268-1-ND
ETHERCAT1:U1 = msrm; DIGIKEY: LAN9252/ML-ND; TAPE_AND_REEL: Tray; TEMP: 0°C to 70°C
ETHERCAT1:X1 = msrm; DIGIKEY: WM7648CT-ND; MF: MOLEX
ETHERCAT1:X3 = msrm; COLOR: beige; DIGIKEY: WM7649CT-ND
ETHERCAT1:Y1 = msrm; DIGIKEY: XC3051CT-ND; F: 25MHz; F_TOLERANCE: ±10ppm; L_CAPACITANCE: 18pF
H1 = msrm; DIGIKEY: 609-5926-ND; PINS: 10
INVERTER:C7 INVERTER:C8 = rcl; SPICEPREFIX: C
INVERTER:CR1-INVERTER:CR3 = msrm; CURRENT: 150mA; DIGIKEY: 1N4148WTPMSCT-ND; VOLTAGE: 100V
INVERTER:D2-INVERTER:D5 INVERTER:D7 INVERTER:D8 = IMDL_lib; CIIVA_IDS: 21182063; COMPONENT_LINK_1_DESCRIPTION: Manufacturer URL; COMPONENT_LINK_1_URL: http://www.infineon.com/; COMPONENT_LINK_3_DESCRIPTION: Package Specification; COMPONENT_LINK_3_URL: http://www.infineon.com/dgdl/SC79-Package_Overview.pdf?folderId=db3a30431936bc4b011951fbddb03b15&fileId=db3a30431936bc4b01195226fe583b41; CONFIGURATION: single; CT_MAX: 15Â pF; DATASHEET: http://www.infineon.com/dgdl/bas3005aseries.pdf?folderId=db3a30431f848401011fcbf2ab4c04c4&fileId=db3a30432d9b3066012db872f12d0bb7; FOOTPRINT_VARIANT_NAME_0: Manufacturer Recommended; GREEN: true; HALOGEN_FREE: true; IF_MAX: 500Â mA; IMPORTED: yes; IMPORTED_FROM: vault; IMPORT_TS: 1521842213; MF: Infineon; MOUNTING_TECHNOLOGY: Surface Mount; MPN: BAS3005A-02V; PACKAGE: SC79; PACKAGE_DESCRIPTION: 2-Pin Semiconductor Package, 0.8 x 1.2 mm Body; PACKING: Reel; PREFIX: D; RELEASE_DATE: 1409237543; VAULT_GUID: EDAD54E0-67A3-4491-B804-28965AC47742; VAULT_REVISION: E1FDBEC9-D20E-4450-8851-E2B6A9887AF8; VF_MAX: 500Â V; VR_MAX: 30Â V
INVERTER:R2 INVERTER:R4-INVERTER:R6 INVERTER:R9 INVERTER:R10 INVERTER:R13-INVERTER:R15 POWER_UNIT:R4 = resistor
INVERTER:U$1-INVERTER:U$3 POWER_UNIT:PS2 = IMDL_lib
J1 = IMDL_lib; AVAILABILITY: In Stock; DESCRIPTION: Connector Header Surface Mount, Right Angle 5 position 0.039 (1.00mm); MF: Molex; MP: 5037630591; PACKAGE: None; PRICE: None; PURCHASE-URL: https://pricing.snapeda.com/search/part/5037630591/?ref=eda
JP1 = pinhead
M1 = msrm; DIGIKEY: 277-1749-ND; PITCH: 3,5
POWER_UNIT:C2-POWER_UNIT:C4 = IMDL_lib; CATEGORY: Capacitor
POWER_UNIT:C5 POWER_UNIT:C9 = msrm; CAPACITANCE: 2.2uF; DIGIKEY: 490-11169-1-ND; TOLERANCE: ±10%; VOLTAGE: 50V
POWER_UNIT:IC2 = msrm; DIGIKEY: AP2204MP-ADJTRG1DICT-ND
POWER_UNIT:Q1 = TRANS_DMN4020LFDE
POWER_UNIT:R2 = msrm; DIGIKEY: YAG2307CT-ND; RVALUE: 100k; SPICEPREFIX: R
POWER_UNIT:R11 = msrm; DIGIKEY: YAG1447CT-ND; RVALUE: 4k99; SPICEPREFIX: R
POWER_UNIT:U1 = IMDL_lib; ACTIVE_LIMITING: yes; CIIVA_IDS: 280364; CIRCUIT_BREAKERS: 1; CIRCUIT_BREAKER_ACCURACY: 10; CIRCUIT_BREAKER_THRESHOLD: 50 mV; CODE__JEDEC: MO-229; COMPONENT_LINK_1_DESCRIPTION: Manufacturer URL; COMPONENT_LINK_1_URL: http://www.linear.com/; COMPONENT_LINK_3_DESCRIPTION: Package Specification; COMPONENT_LINK_3_URL: http://cds.linear.com/docs/en/packaging/DFN_12_05-08-1695.pdf; DATASHEET: http://cds.linear.com/docs/en/datasheet/4356fa.pdf; DATASHEET_VERSION: Rev. A; EXTENDED_TEMP: C, I, H; FAST_COMPARATOR: no; FAULT: no; FOLDBACK: yes; FOOTPRINT_VARIANT_NAME_0: Manufacturer Recommended; IMPORTED: yes; IMPORTED_FROM: vault; IMPORT_TS: 1521855815; IN_RUSH_CURRENT: Ramp; MF: Linear Technology; MOUNTING_TECHNOLOGY: Surface Mount; MPN: LT4356IDE-1#PBF; PACKAGE: DE-UE-12; PACKAGE_DESCRIPTION: 12-Pin Plastic DFN, Body 4 x 3 mm, Pitch 0.5 mm; PACKAGE_VERSION: Rev. D, 06/2010; POWER_GOOD: no; PREFIX: U; RELEASE_DATE: 1377783053; RESET: no; ROHS: Yes; VAULT_GUID: 8B93637D-5FE0-477F-B341-97109F4E71FC; VAULT_REVISION: E0CC90F7-5B63-48A8-B828-07365940982B; VIN_RANGE: 4 to 80 V
U$1 = msrm; DIGIKEY: 277-17182-ND
X2 = msrm; DIGIKEY: 455-1649-ND
X4 = msrm; DIGIKEY: WM7652CT-ND
X5 = msrm; DIGIKEY: WM10655CT-ND

## Nets
!FLT!: POWER_UNIT:U1.8
+3V3: AFE_TRQ1:C2.1 AFE_TRQ1:IC1.8 AFE_TRQ1:R2.2 ATSAMD:C4.1 ATSAMD:C6.1 ATSAMD:C7.1 ATSAMD:C9.1 ATSAMD:C10.1 ATSAMD:C11.1 ATSAMD:IC2.17 ATSAMD:IC2.36 ATSAMD:IC2.41 ATSAMD:IC2.44 ATSAMD:L1.1 ATSAMD:R6.2 ATSAMD:R7.2 H1.1 J1.1 POWER_UNIT:C2.1 POWER_UNIT:D3.2 POWER_UNIT:IC1.1 POWER_UNIT:IC1.5
+5V: ETHERCAT1:C66.1 ETHERCAT1:L5.1 POWER_UNIT:C4.1 POWER_UNIT:D2.2 POWER_UNIT:L5.1 POWER_UNIT:PS2.3 X4.1
+5V_TRQ: POWER_UNIT:C9.1 POWER_UNIT:IC3.5 X5.1
+15V: INVERTER:C1.2 INVERTER:C3.2 INVERTER:C5.2 INVERTER:R5.2 INVERTER:R10.2 INVERTER:R14.2 INVERTER:U$1.2 INVERTER:U$2.2 INVERTER:U$3.2 POWER_UNIT:C8.1 POWER_UNIT:D4.2 POWER_UNIT:IC2.1 POWER_UNIT:R5.2
+24V: M1.1 POWER_UNIT:R4.2 POWER_UNIT:U1.6 POWER_UNIT:U1.7
+24V_F: CURRENT_SENS:C8.1 CURRENT_SENS:IC4.1 CURRENT_SENS:IC4.3 INVERTER:C7.+ INVERTER:C8.+ INVERTER:U$1.18-19-20-21-22-23 INVERTER:U$2.18-19-20-21-22-23 INVERTER:U$3.18-19-20-21-22-23 POWER_UNIT:C3.1 POWER_UNIT:C5.1 POWER_UNIT:C6.1 POWER_UNIT:C7.1 POWER_UNIT:D1.2 POWER_UNIT:IC2.5 POWER_UNIT:IC2.8 POWER_UNIT:IC3.1 POWER_UNIT:IC3.3 POWER_UNIT:PS2.1 POWER_UNIT:Q1.4_1 POWER_UNIT:Q1.4_2 POWER_UNIT:R2.2 POWER_UNIT:U1.3
AFE_TRQ1:ANAREF: AFE_TRQ1:IC1.1 AFE_TRQ1:R2.1 AFE_TRQ1:R4.2
AFE_TRQ1:N$1: AFE_TRQ1:IC1.5 AFE_TRQ1:R1.1
AFE_TRQ1:N$4: AFE_TRQ1:C1.2 AFE_TRQ1:IC1.6 AFE_TRQ1:R1.2 AFE_TRQ1:R3.1
ATSAMD:ANAREF: ATSAMD:IC2.4
ATSAMD:D1: ATSAMD:D1.2 ATSAMD:IC2.39
ATSAMD:D2: ATSAMD:D2.2 ATSAMD:IC2.37
ATSAMD:D3: ATSAMD:D3.2 ATSAMD:IC2.38
ATSAMD:N$1: ATSAMD:D3.1 ATSAMD:R4.1
ATSAMD:N$2: ATSAMD:D2.1 ATSAMD:R1.1
ATSAMD:N$12: ATSAMD:C5.1 ATSAMD:C8.1 ATSAMD:IC2.6 ATSAMD:L1.2
ATSAMD:N$13: ATSAMD:R5.2 ATSAMD:S2.2 ATSAMD:S2.4
ATSAMD:N$16: ATSAMD:D1.1 ATSAMD:R2.1
ATSAMD:XIN: ATSAMD:C22.2 ATSAMD:IC2.23 ATSAMD:Y2.3
ATSAMD:XOUT: ATSAMD:C23.2 ATSAMD:IC2.24 ATSAMD:Y2.1
CURRENT_SENS:+3V3_CURR: CURRENT_SENS:C1.2 CURRENT_SENS:C2.2 CURRENT_SENS:C7.1 CURRENT_SENS:IC1.12 CURRENT_SENS:IC2.12 CURRENT_SENS:IC4.5
CURRENT_SENS:U_OUT: CURRENT_SENS:C4.1 CURRENT_SENS:IC1.10 CURRENT_SENS:R3.2
CURRENT_SENS:V_OUT: CURRENT_SENS:C3.1 CURRENT_SENS:IC2.10 CURRENT_SENS:R4.2
ECAT_CS: ATSAMD:IC2.20 ETHERCAT1:R19.2
ECAT_MISO: ATSAMD:IC2.14 ETHERCAT1:R22.2
ECAT_MOSI: ATSAMD:IC2.13 ETHERCAT1:R23.2
ECAT_SCK: ATSAMD:IC2.19 ETHERCAT1:R18.2
ECAT_SQI2: ATSAMD:IC2.15 ETHERCAT1:R21.2
ECAT_SQI3: ATSAMD:IC2.16 ETHERCAT1:R20.2
EN: POWER_UNIT:U1.9
ENC_MISO: ATSAMD:IC2.10 X4.7
ENC_MOSI: ATSAMD:IC2.9 X4.8
ENC_NCS: ATSAMD:IC2.11 X4.6
ENC_SCK: ATSAMD:IC2.12 X4.5
ETHERCAT1:#MISO: ETHERCAT1:R22.1 ETHERCAT1:U1.13
ETHERCAT1:#MOSI: ETHERCAT1:R23.1 ETHERCAT1:U1.17
ETHERCAT1:#SCK: ETHERCAT1:R18.1 ETHERCAT1:U1.19
ETHERCAT1:#SCS#: ETHERCAT1:R19.1 ETHERCAT1:U1.50
ETHERCAT1:#SQI2: ETHERCAT1:R21.1 ETHERCAT1:U1.12
ETHERCAT1:#SQI3: ETHERCAT1:R20.1 ETHERCAT1:U1.35
ETHERCAT1:+3V3 [power]: ETHERCAT1:C10.1 ETHERCAT1:C11.1 ETHERCAT1:C12.1 ETHERCAT1:C13.1 ETHERCAT1:C14.1 ETHERCAT1:C15.1 ETHERCAT1:C22.1 ETHERCAT1:C33.1 ETHERCAT1:D1.2 ETHERCAT1:IC1.8 ETHERCAT1:IC2.1 ETHERCAT1:IC2.5 ETHERCAT1:L1.1 ETHERCAT1:L2.1 ETHERCAT1:L3.1 ETHERCAT1:R4.2 ETHERCAT1:R5.2 ETHERCAT1:R6.2 ETHERCAT1:U1.5 ETHERCAT1:U1.7 ETHERCAT1:U1.14 ETHERCAT1:U1.20 ETHERCAT1:U1.32 ETHERCAT1:U1.37 ETHERCAT1:U1.47
ETHERCAT1:CT1: ETHERCAT1:C31.1 ETHERCAT1:R16.1 ETHERCAT1:T1.3 ETHERCAT1:T1.6
ETHERCAT1:CT2: ETHERCAT1:C32.1 ETHERCAT1:R17.1 ETHERCAT1:T2.3 ETHERCAT1:T2.6
ETHERCAT1:GPIO0: ETHERCAT1:R24.2 ETHERCAT1:R26.1 ETHERCAT1:U1.48
ETHERCAT1:GPIO1: ETHERCAT1:R25.2 ETHERCAT1:R27.1 ETHERCAT1:U1.46
ETHERCAT1:GPIO2: ETHERCAT1:R6.1 ETHERCAT1:R7.2 ETHERCAT1:U1.45
ETHERCAT1:I2C_SCL: ETHERCAT1:IC1.6 ETHERCAT1:R4.1 ETHERCAT1:U1.43
ETHERCAT1:I2C_SDA: ETHERCAT1:IC1.5 ETHERCAT1:R5.1 ETHERCAT1:U1.42
ETHERCAT1:IN_RX_N: ETHERCAT1:T1.9 ETHERCAT1:X1.4
ETHERCAT1:IN_RX_P: ETHERCAT1:T1.10 ETHERCAT1:X1.3
ETHERCAT1:IN_TX_N: ETHERCAT1:T1.15 ETHERCAT1:X1.2
ETHERCAT1:IN_TX_P: ETHERCAT1:T1.16 ETHERCAT1:X1.1
ETHERCAT1:IRQ: ETHERCAT1:U1.44
ETHERCAT1:N$1: ETHERCAT1:D2.2 ETHERCAT1:R26.2
ETHERCAT1:N$2: ETHERCAT1:D3.2 ETHERCAT1:R27.2
ETHERCAT1:N$3: ETHERCAT1:IC2.3 ETHERCAT1:IC2.4 ETHERCAT1:L5.2
ETHERCAT1:N$15: ETHERCAT1:D1.1 ETHERCAT1:R7.1
ETHERCAT1:OSCI: ETHERCAT1:R1.2 ETHERCAT1:U1.1
ETHERCAT1:OSCI1: ETHERCAT1:C20.2 ETHERCAT1:R1.1 ETHERCAT1:Y1.3
ETHERCAT1:OSCO: ETHERCAT1:C21.2 ETHERCAT1:U1.2 ETHERCAT1:Y1.1
ETHERCAT1:OSCVDD12: ETHERCAT1:U1.3
ETHERCAT1:OUT_RX_N: ETHERCAT1:T2.9 ETHERCAT1:X3.5
ETHERCAT1:OUT_RX_P: ETHERCAT1:T2.10 ETHERCAT1:X3.4
ETHERCAT1:OUT_TX_N: ETHERCAT1:T2.15 ETHERCAT1:X3.3
ETHERCAT1:OUT_TX_P: ETHERCAT1:T2.16 ETHERCAT1:X3.2
ETHERCAT1:RBIAS: ETHERCAT1:R2.2 ETHERCAT1:U1.57
ETHERCAT1:RST#: ETHERCAT1:U1.11
ETHERCAT1:RXA_N: ETHERCAT1:C24.1 ETHERCAT1:R10.1 ETHERCAT1:T1.8 ETHERCAT1:U1.54
ETHERCAT1:RXA_P: ETHERCAT1:C23.1 ETHERCAT1:R11.1 ETHERCAT1:T1.7 ETHERCAT1:U1.55
ETHERCAT1:RXB_N: ETHERCAT1:C28.1 ETHERCAT1:R14.1 ETHERCAT1:T2.2 ETHERCAT1:U1.61
ETHERCAT1:RXB_P: ETHERCAT1:C27.1 ETHERCAT1:R15.1 ETHERCAT1:T2.1 ETHERCAT1:U1.60
ETHERCAT1:TXA_N: ETHERCAT1:C26.1 ETHERCAT1:R8.1 ETHERCAT1:T1.2 ETHERCAT1:U1.52
ETHERCAT1:TXA_P: ETHERCAT1:C25.1 ETHERCAT1:R9.1 ETHERCAT1:T1.1 ETHERCAT1:U1.53
ETHERCAT1:TXB_N: ETHERCAT1:C30.1 ETHERCAT1:R12.1 ETHERCAT1:T2.8 ETHERCAT1:U1.63
ETHERCAT1:TXB_P: ETHERCAT1:C29.1 ETHERCAT1:R13.1 ETHERCAT1:T2.7 ETHERCAT1:U1.62
ETHERCAT1:VDD [power]: ETHERCAT1:C16.1 ETHERCAT1:C17.1 ETHERCAT1:C18.1 ETHERCAT1:C19.1 ETHERCAT1:L4.1 ETHERCAT1:U1.6 ETHERCAT1:U1.24 ETHERCAT1:U1.38
ETHERCAT1:VDD12TX [power]: ETHERCAT1:C6.1 ETHERCAT1:C7.1 ETHERCAT1:C8.1 ETHERCAT1:C9.1 ETHERCAT1:L4.2 ETHERCAT1:U1.56 ETHERCAT1:U1.59
ETHERCAT1:VDD33BIAS [power]: ETHERCAT1:C5.1 ETHERCAT1:L3.2 ETHERCAT1:U1.58
ETHERCAT1:VDD33TXRX1 [power]: ETHERCAT1:C1.1 ETHERCAT1:C2.1 ETHERCAT1:L1.2 ETHERCAT1:R8.2 ETHERCAT1:R9.2 ETHERCAT1:R10.2 ETHERCAT1:R11.2 ETHERCAT1:R16.2 ETHERCAT1:U1.51
ETHERCAT1:VDD33TXRX2 [power]: ETHERCAT1:C3.1 ETHERCAT1:C4.1 ETHERCAT1:L2.2 ETHERCAT1:R12.2 ETHERCAT1:R13.2 ETHERCAT1:R14.2 ETHERCAT1:R15.2 ETHERCAT1:R17.2 ETHERCAT1:U1.64
GND: AFE_TRQ1:C2.2 AFE_TRQ1:IC1.4 AFE_TRQ1:R4.1 ATSAMD:C4.2 ATSAMD:C5.2 ATSAMD:C6.2 ATSAMD:C7.2 ATSAMD:C8.2 ATSAMD:C9.2 ATSAMD:C10.2 ATSAMD:C11.2 ATSAMD:C12.2 ATSAMD:C22.1 ATSAMD:C23.1 ATSAMD:IC2.5 ATSAMD:IC2.18 ATSAMD:IC2.35 ATSAMD:IC2.42 ATSAMD:IC2.EXP ATSAMD:R1.2 ATSAMD:R2.2 ATSAMD:R4.2 ATSAMD:R5.1 CURRENT_SENS:C1.1 CURRENT_SENS:C2.1 CURRENT_SENS:C3.2 CURRENT_SENS:C4.2 CURRENT_SENS:C5.2 CURRENT_SENS:C6.2 CURRENT_SENS:C7.2 CURRENT_SENS:C8.2 CURRENT_SENS:IC1.5 CURRENT_SENS:IC1.6 CURRENT_SENS:IC1.8 CURRENT_SENS:IC1.9 CURRENT_SENS:IC1.11 CURRENT_SENS:IC2.5 CURRENT_SENS:IC2.6 CURRENT_SENS:IC2.8 CURRENT_SENS:IC2.9 CURRENT_SENS:IC2.11 CURRENT_SENS:IC4.2 ETHERCAT1:C1.2 ETHERCAT1:C2.2 ETHERCAT1:C3.2 ETHERCAT1:C4.2 ETHERCAT1:C5.2 ETHERCAT1:C6.2 ETHERCAT1:C7.2 ETHERCAT1:C8.2 ETHERCAT1:C9.2 ETHERCAT1:C10.2 ETHERCAT1:C11.2 ETHERCAT1:C12.2 ETHERCAT1:C13.2 ETHERCAT1:C14.2 ETHERCAT1:C15.2 ETHERCAT1:C16.2 ETHERCAT1:C17.2 ETHERCAT1:C18.2 ETHERCAT1:C19.2 ETHERCAT1:C20.1 ETHERCAT1:C21.1 ETHERCAT1:C22.2 ETHERCAT1:C23.2 ETHERCAT1:C24.2 ETHERCAT1:C25.2 ETHERCAT1:C26.2 ETHERCAT1:C27.2 ETHERCAT1:C28.2 ETHERCAT1:C29.2 ETHERCAT1:C30.2 ETHERCAT1:C31.2 ETHERCAT1:C32.2 ETHERCAT1:C33.2 ETHERCAT1:C66.2 ETHERCAT1:D2.1 ETHERCAT1:D3.1 ETHERCAT1:IC1.1 ETHERCAT1:IC1.2 ETHERCAT1:IC1.3 ETHERCAT1:IC1.4 ETHERCAT1:IC1.7 ETHERCAT1:IC1.9 ETHERCAT1:IC2.2 ETHERCAT1:R2.1 ETHERCAT1:R24.1 ETHERCAT1:R25.1 ETHERCAT1:U1.4 ETHERCAT1:U1.8 ETHERCAT1:U1.9 ETHERCAT1:U1.10 ETHERCAT1:U1.41 ETHERCAT1:U1.65 ETHERCAT1:Y1.2 ETHERCAT1:Y1.4 H1.3 H1.5 H1.9 INVERTER:C1.1 INVERTER:C3.1 INVERTER:C5.1 INVERTER:C7.- INVERTER:C8.- INVERTER:U$1.3 INVERTER:U$1.6 INVERTER:U$1.8 INVERTER:U$1.11-12-13-14-15 INVERTER:U$1.28 INVERTER:U$2.3 INVERTER:U$2.6 INVERTER:U$2.8 INVERTER:U$2.11-12-13-14-15 INVERTER:U$2.28 INVERTER:U$3.3 INVERTER:U$3.6 INVERTER:U$3.8 INVERTER:U$3.11-12-13-14-15 INVERTER:U$3.28 J1.2 M1.2 POWER_UNIT:C1.2 POWER_UNIT:C2.2 POWER_UNIT:C3.2 POWER_UNIT:C4.2 POWER_UNIT:C5.2 POWER_UNIT:C6.2 POWER_UNIT:C7.2 POWER_UNIT:C8.2 POWER_UNIT:C9.2 POWER_UNIT:IC1.2 POWER_UNIT:IC2.7 POWER_UNIT:IC2.9 POWER_UNIT:IC3.2 POWER_UNIT:PS2.2 POWER_UNIT:R6.1 POWER_UNIT:R7.1 POWER_UNIT:R8.1 POWER_UNIT:R9.1 POWER_UNIT:R10.1 POWER_UNIT:R11.1 POWER_UNIT:U1.10 POWER_UNIT:U1.12 X4.2 X5.2
HALL_A: ATSAMD:IC2.33 J1.5 JP1.9
HALL_B: ATSAMD:IC2.32 J1.4 JP1.8
HALL_C: ATSAMD:IC2.31 J1.3 JP1.7
HALL_O: ATSAMD:IC2.34 JP1.10
INVERTER:N$1: INVERTER:R3.2 INVERTER:R15.2 INVERTER:U$1.24
INVERTER:N$2: INVERTER:CR2.1 INVERTER:R5.1
INVERTER:N$3: INVERTER:D2.2 INVERTER:R15.1
INVERTER:N$4: INVERTER:C2.1 INVERTER:U$1.1
INVERTER:N$5: INVERTER:D3.1 INVERTER:R1.1 INVERTER:U$1.7
INVERTER:N$6: INVERTER:R1.2 INVERTER:R2.2 INVERTER:U$1.9
INVERTER:N$7: INVERTER:CR1.1 INVERTER:R10.1
INVERTER:N$8: INVERTER:D3.2 INVERTER:R2.1
INVERTER:N$9: INVERTER:CR3.1 INVERTER:R14.1
INVERTER:N$11: INVERTER:R6.2 INVERTER:R8.2 INVERTER:U$2.24
INVERTER:N$13: INVERTER:D2.1 INVERTER:R3.1 INVERTER:U$1.25
INVERTER:N$14: INVERTER:D4.1 INVERTER:R7.1 INVERTER:U$2.7
INVERTER:N$15: INVERTER:R4.2 INVERTER:R7.2 INVERTER:U$2.9
INVERTER:N$16: INVERTER:D4.2 INVERTER:R4.1
INVERTER:N$18: INVERTER:D5.1 INVERTER:R8.1 INVERTER:U$2.25
INVERTER:N$19: INVERTER:C4.1 INVERTER:U$2.1
INVERTER:N$21: INVERTER:D5.2 INVERTER:R6.1
INVERTER:N$25: INVERTER:R12.2 INVERTER:R13.2 INVERTER:U$3.24
INVERTER:N$26: INVERTER:D7.1 INVERTER:R11.1 INVERTER:U$3.7
INVERTER:N$27: INVERTER:R9.2 INVERTER:R11.2 INVERTER:U$3.9
INVERTER:N$28: INVERTER:D7.2 INVERTER:R9.1
INVERTER:N$30: INVERTER:D8.1 INVERTER:R12.1 INVERTER:U$3.25
INVERTER:N$31: INVERTER:C6.1 INVERTER:U$3.1
INVERTER:N$33: INVERTER:D8.2 INVERTER:R13.1
N$1: CURRENT_SENS:IC1.3,4 INVERTER:C2.2 INVERTER:CR3.2 INVERTER:U$1.10 INVERTER:U$1.16-17 INVERTER:U$1.26 INVERTER:U$1.27
N$2: CURRENT_SENS:IC2.3,4 INVERTER:C4.2 INVERTER:CR1.2 INVERTER:U$2.10 INVERTER:U$2.16-17 INVERTER:U$2.26 INVERTER:U$2.27
N$3: CURRENT_SENS:SJ1.1 INVERTER:C6.2 INVERTER:CR2.2 INVERTER:U$3.10 INVERTER:U$3.16-17 INVERTER:U$3.26 INVERTER:U$3.27
NRESET: ATSAMD:C12.1 ATSAMD:IC2.40 ATSAMD:R6.1 ATSAMD:S2.1 ATSAMD:S2.3 H1.10
POWER_UNIT:N$1: POWER_UNIT:Q1.3 POWER_UNIT:R1.2
POWER_UNIT:N$2: POWER_UNIT:R1.1 POWER_UNIT:U1.4
POWER_UNIT:N$3: POWER_UNIT:Q1.1 POWER_UNIT:Q1.2 POWER_UNIT:Q1.5 POWER_UNIT:Q1.6 POWER_UNIT:R4.1 POWER_UNIT:U1.5
POWER_UNIT:N$4: POWER_UNIT:R2.1 POWER_UNIT:R11.2 POWER_UNIT:U1.2
POWER_UNIT:N$6: POWER_UNIT:D1.1 POWER_UNIT:R7.2
POWER_UNIT:N$7: POWER_UNIT:IC2.4 POWER_UNIT:R5.1 POWER_UNIT:R6.2
POWER_UNIT:N$8: POWER_UNIT:C1.1 POWER_UNIT:U1.1
POWER_UNIT:N$9: POWER_UNIT:D2.1 POWER_UNIT:R8.2
POWER_UNIT:N$10: POWER_UNIT:D3.1 POWER_UNIT:R9.2
POWER_UNIT:N$11: POWER_UNIT:D4.1 POWER_UNIT:R10.2
POWER_UNIT:N$12 [power]: POWER_UNIT:IC1.3 POWER_UNIT:IC1.4 POWER_UNIT:L5.2
SWCLK: ATSAMD:IC2.45 ATSAMD:R7.1 H1.4
SWDIO: ATSAMD:IC2.46 H1.2
SWO: H1.6
TRQ_ADC: AFE_TRQ1:C1.1 AFE_TRQ1:IC1.7 AFE_TRQ1:R3.2 ATSAMD:IC2.48
TRQ_N: AFE_TRQ1:IC1.2 X5.3
TRQ_P: AFE_TRQ1:IC1.3 X5.4
U: CURRENT_SENS:IC1.1,2 X2.1
U_ADC: ATSAMD:IC2.8 CURRENT_SENS:C5.1 CURRENT_SENS:R3.1
UH: ATSAMD:IC2.25 INVERTER:U$1.4 JP1.1
UL: ATSAMD:IC2.26 INVERTER:U$1.5 JP1.2
V: CURRENT_SENS:IC2.1,2 X2.2
V_ADC: ATSAMD:IC2.7 CURRENT_SENS:C6.1 CURRENT_SENS:R4.1
VH: ATSAMD:IC2.27 INVERTER:U$2.4 JP1.3
VL: ATSAMD:IC2.28 INVERTER:U$2.5 JP1.4
W: CURRENT_SENS:SJ1.2 X2.3
WH: ATSAMD:IC2.29 INVERTER:U$3.4 JP1.5
WL: ATSAMD:IC2.30 INVERTER:U$3.5 JP1.6